# Altium PCB HaptikGeriBeslemeDevresi_PCB.PcbDoc
Units mm, origin at the board's own origin, x right, y up, seen from the top; angles counter-clockwise.
Board outline 72 x 71 mm, 2 copper layers (Top Layer, Bottom Layer); 35 components, 36 nets, 155 pads, 25 vias.
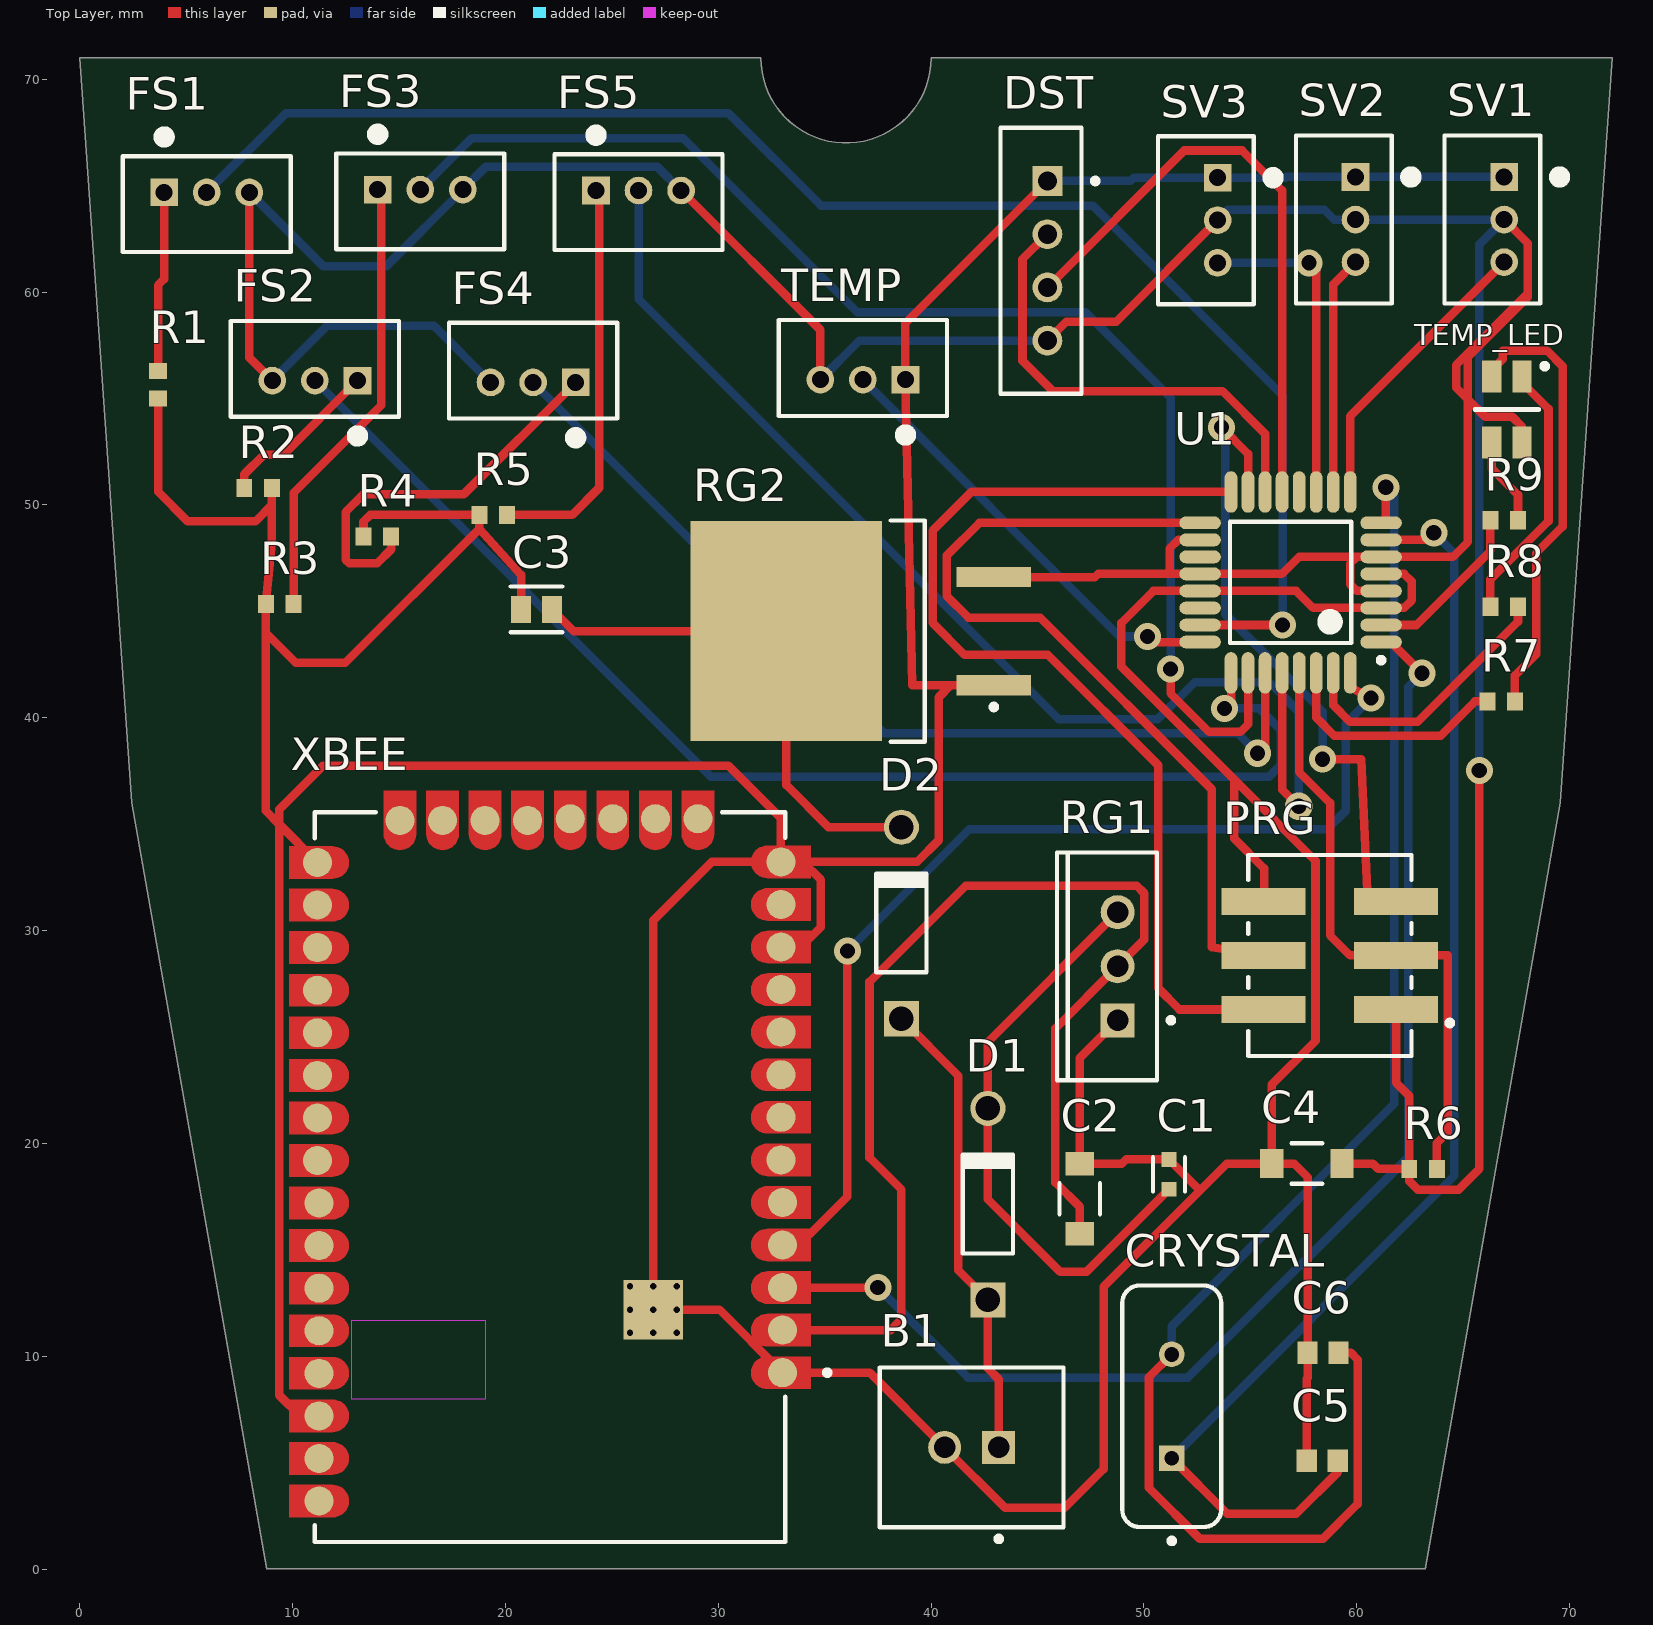
[diagram p0: Top Layer view]
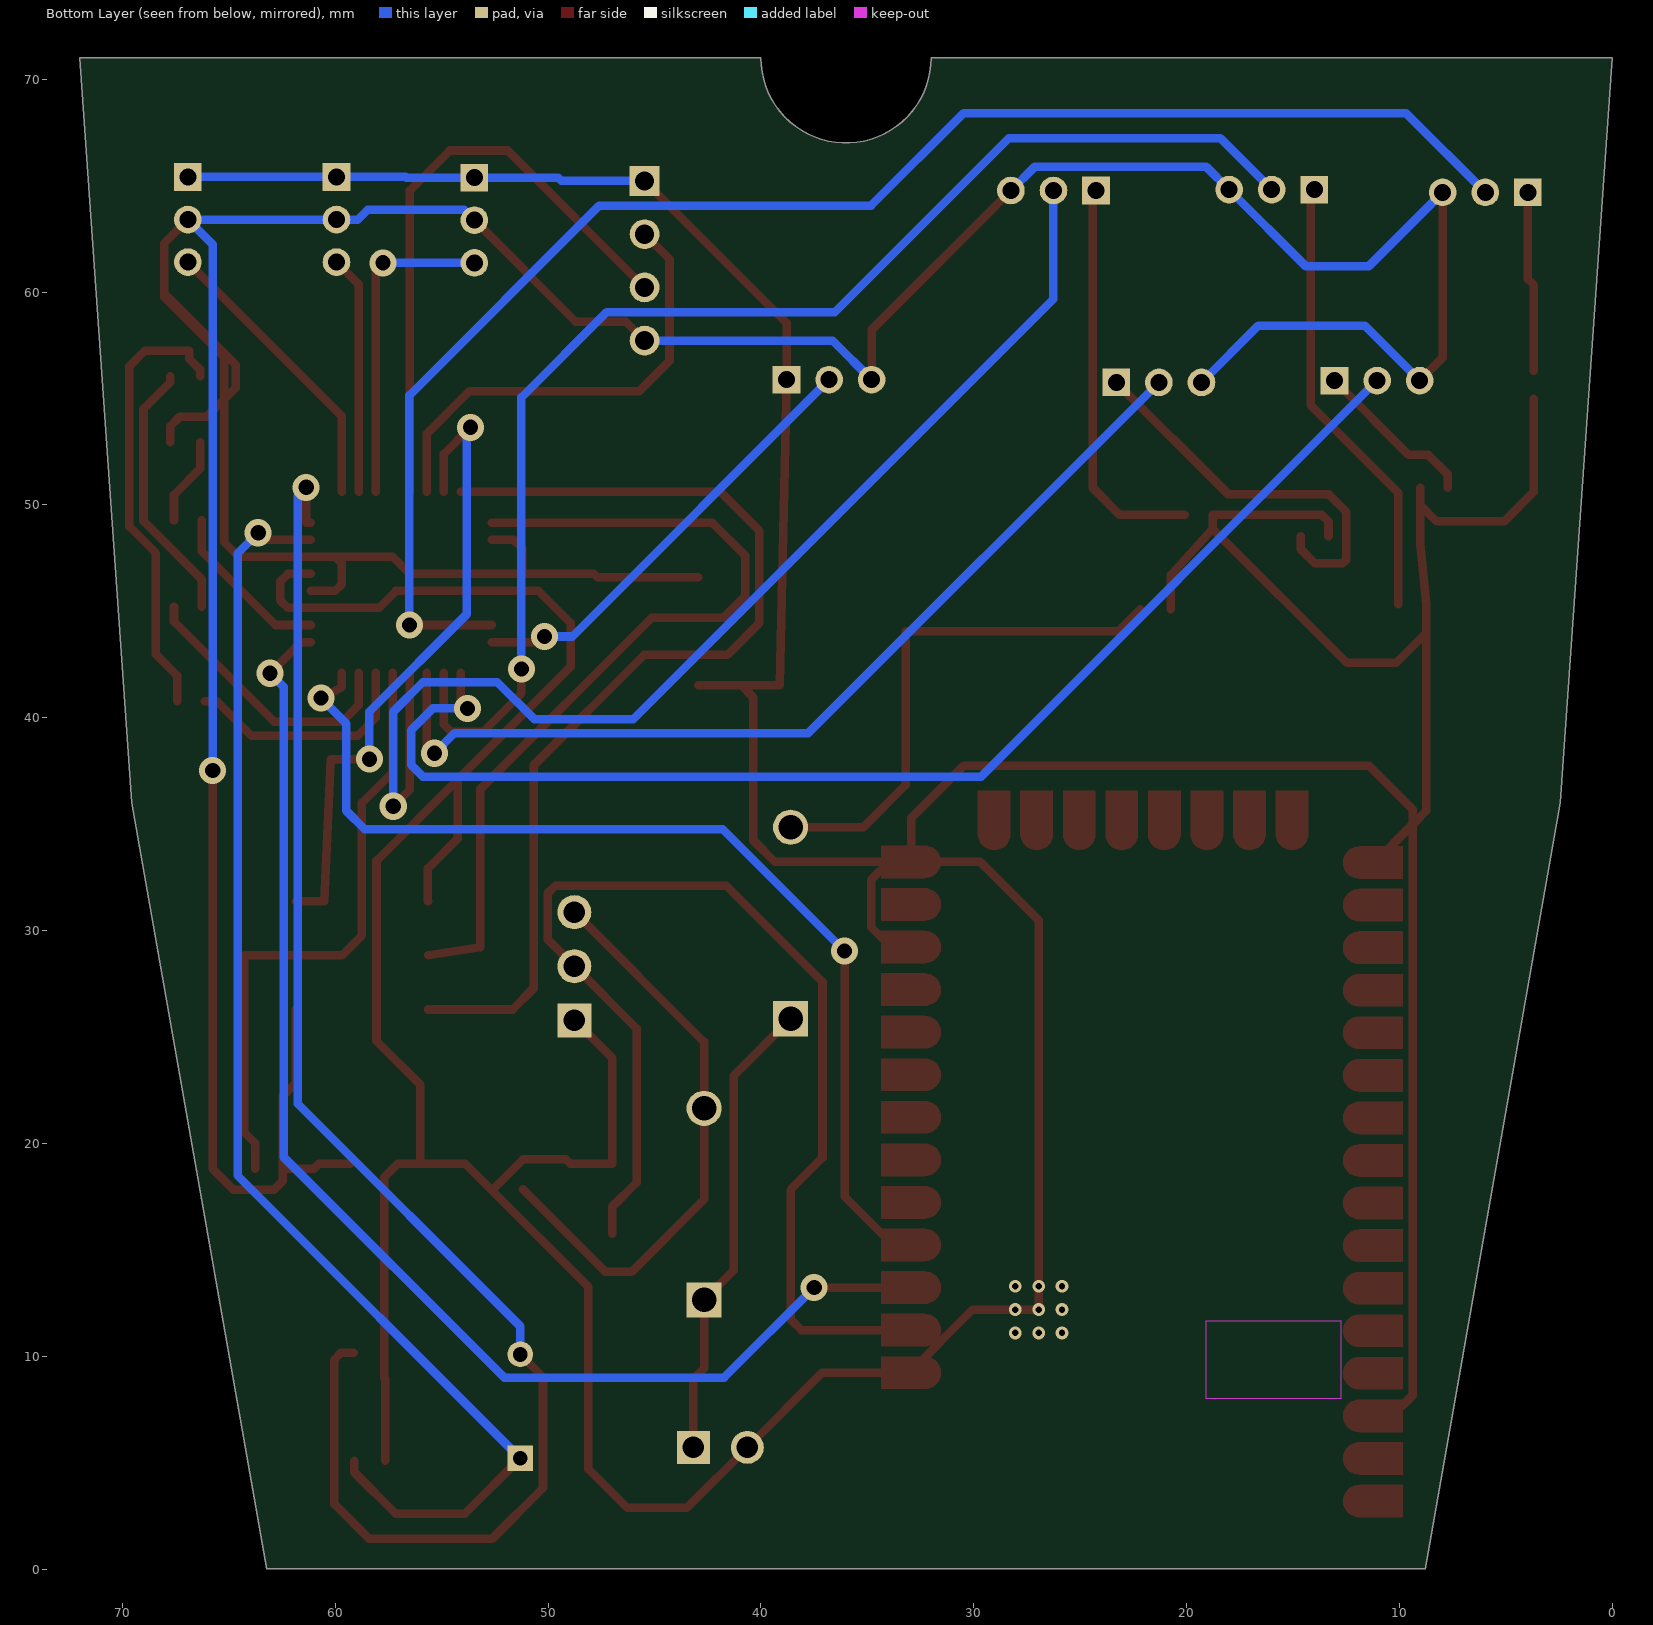
[diagram p1: Bottom Layer view, seen from below]
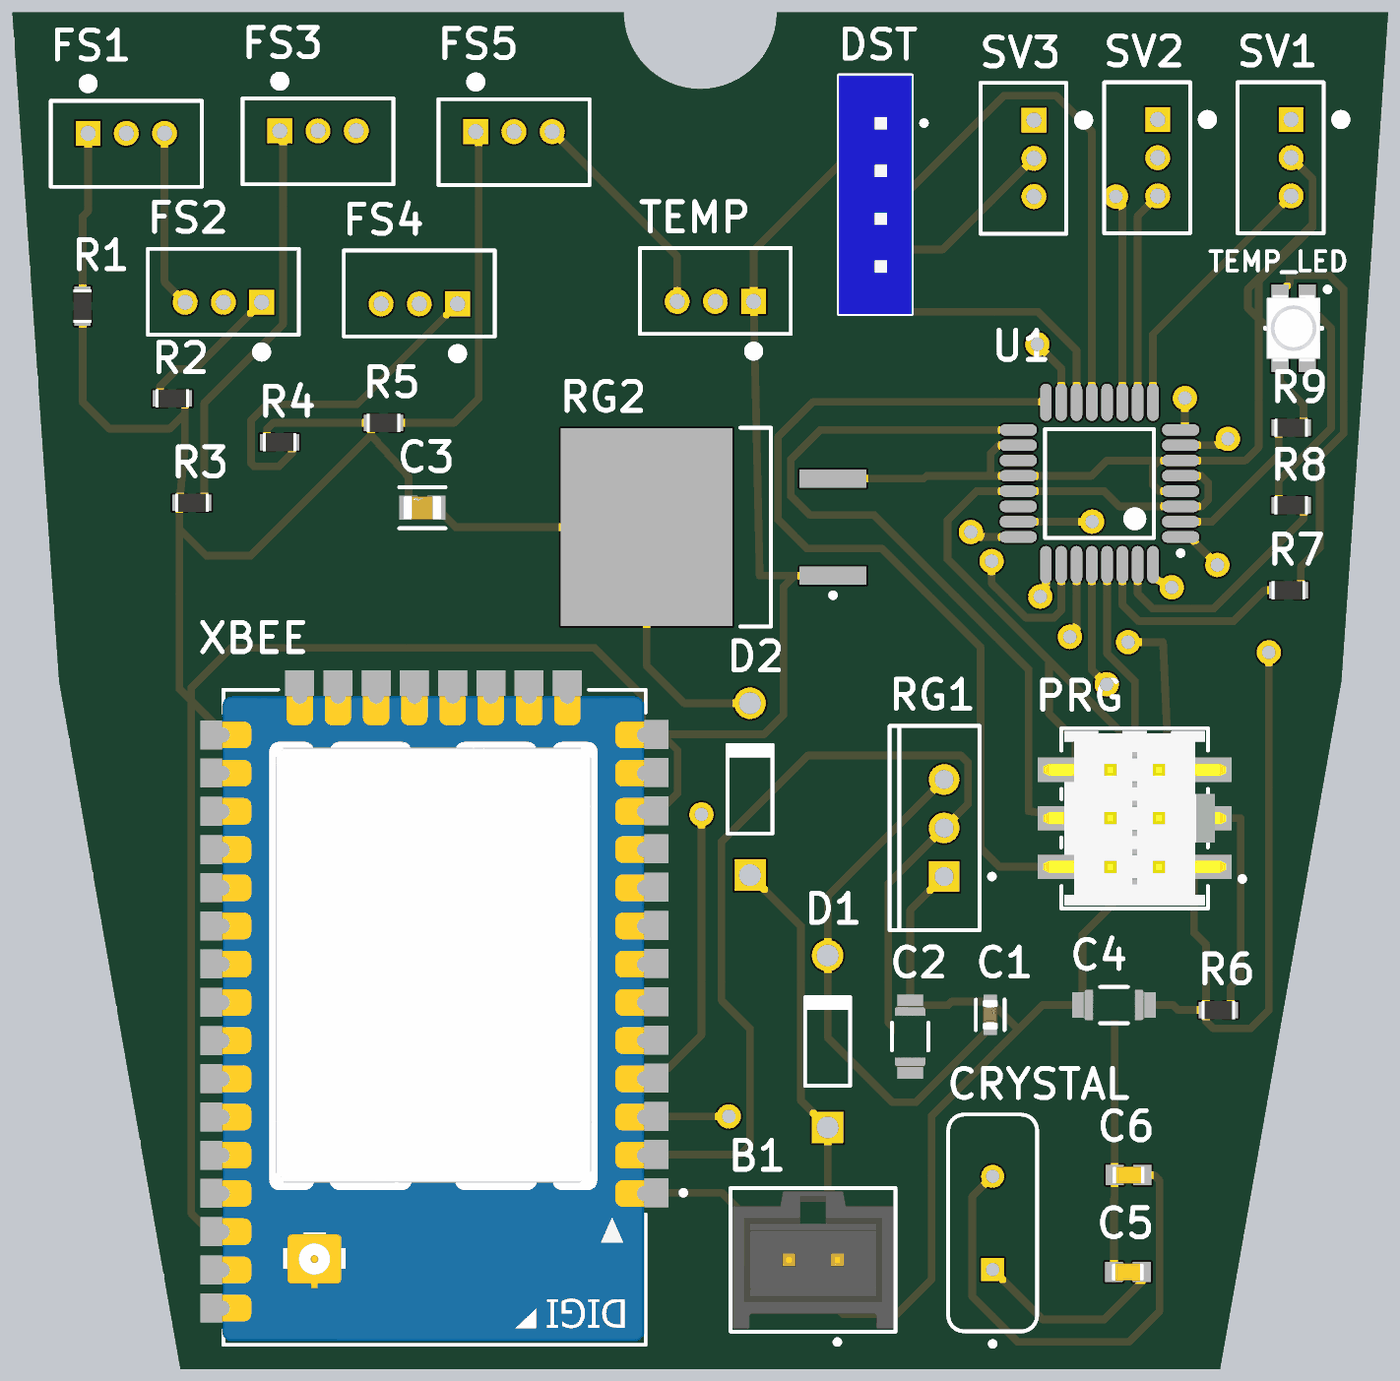
[diagram p2: 3D render of the assembled board from above, using the file's embedded part models]

## Layer stack, top to bottom
Top Solder: solder mask 0.0102, Solder Resist, Dk 3.5
Top Layer: signal copper 0.0356
Dielectric 1: dielectric 0.32, FR-4, Dk 4.8
Bottom Layer: signal copper 0.0356
Bottom Solder: solder mask 0.0102, Solder Resist, Dk 3.5

## Board outline
8.8,0.005 2.452,36.005 0.005,71.005 32.005,71.005 ccw(c36.005,71.005) 40.005,71.005 72.005,71.005 69.558,36.005 63.21,0.005

## Design rules (kind name [scope] priority, off if disabled: settings)
Clearance [All] p1: gap=0.254 ignorepadtopadclearanceinfootprint=FALSE except(0: Arc-Hole Track-Hole SMDPad-Hole THPad-Hole Via-Hole Fill-Hole Poly-Hole Region-Hole Text-Hole)
PolygonConnect [All] p1: connectstyle=Relief reliefconductorwidth=0.254 reliefentries=4 polygonreliefangle="90 Angle" airgapwidth=0.254
RoomDefinition BDDT_Proje_Berk_Ozan_Enes_Görkem_Necdet_Shematic [InComponentClass('BDDT_Proje_Berk_Ozan_Enes_Görkem_Necdet_Shematic')] p1: confinementstyle=ConfineIn formatcopy=TRUE lockcomponents=FALSE outline 151.486,1.956 323.444,1.956 323.444,138.227 151.486,138.227
RoutingVias [All] p1: holewidth=0.711 width=1.27 viastyle="Through Hole" minholewidth=0.711 minwidth=1.27 maxholewidth=0.711 maxwidth=1.27
SolderMaskExpansion [All] p1: expansion=0.102 istentingtop=FALSE
Width [All] p1: maxlimit=0.5 minlimit=0.3 preferedwidth=0.4
30 further rules are at their usual default settings.

## Components (designator, comment, footprint, x,y, rotation, side; value= is the part's Value field where it differs from the comment)
B1 "90136-1202" FP-90136-1202-MFG 41.91,5.715 r0 top
C1 "10uF" FP-C1608-080-MFG 51.181,18.542 r90 top
C2 "100uF" FP-C3216X5R1A107M160AC-MFG 46.99,17.399 r90 top
C3 "10uF" FP-GRM21B-0_1-IPC_C 21.463,45.085 r180 top
C4 "100uF" FP-C3216X5R1A107M160AC-MFG 57.658,19.05 r180 top
C5 "22pF" CAPC1608X90X35ML10T15 58.383,5.08 r0 top
C6 "22pF" CAPC1608X90X35ML10T15 58.42,10.16 r0 top
CRYSTAL "16Mhz" FOX-FOXSLF160-20 51.308,7.647 r90 top
D1 "1N4001-T" DIOD-DO-41-P-2_V 42.672,17.145 r90 top
D2 "1N4001-T" DIOD-DO-41-P-2_V 38.608,30.353 r90 top
DST "B4B-EH-A(LF)(SN)" JST-B4B-EH-A_V 45.466,61.468 r270 top
FS1 "B3B-PH-K-S(LF)(SN)" JST-B3B-PH-K-S-3_V 5.969,64.135 r0 top
FS2 "B3B-PH-K-S(LF)(SN)" JST-B3B-PH-K-S-3_V 11.049,56.388 r180 top
FS3 "B3B-PH-K-S(LF)(SN)" JST-B3B-PH-K-S-3_V 16.002,64.262 r0 top
FS4 "B3B-PH-K-S(LF)(SN)" JST-B3B-PH-K-S-3_V 21.304,56.303 r180 top
FS5 "B3B-PH-K-S(LF)(SN)" JST-B3B-PH-K-S-3_V 26.257,64.22 r0 top
PRG "IPL1-103-02-L-D-K" FP-IPL1-103-02-L-D-K-0 58.739,28.829 r180 top
R1 "10k" RESC1609X55X30LL15T15 3.683,55.641 r90 top
R2 "10k" RESC1609X55X30LL15T15 8.382,50.8 r180 top
R3 "10k" RESC1609X55X30LL15T15 9.398,45.339 r0 top
R4 "10k" RESC1609X55X30LL15T15 13.985,48.514 r0 top
R5 "10k" RESC1609X55X30LL15T15 19.431,49.53 r0 top
R6 "10k" RESC1609X55X30LL15T15 63.119,18.796 r180 top
R7 "220" RESC1608X55X30LL15T15 66.787,40.767 r180 top
R8 "220" RESC1608X55X30LL15T15 66.929,45.212 r0 top
R9 "220" RESC1608X55X30LL15T15 66.929,49.276 r180 top
RG1 "LM1117T-3.3/NOPB" NDE0003A 48.768,28.321 r90 top
RG2 "L7905CD2T-TR" TO-263_L 36.703,44.069 r180 top
SV1 "B3B-PH-K-S(LF)(SN)" JST-B3B-PH-K-S-3_V 66.379,63.405 r270 top
SV2 "B3B-PH-K-S(LF)(SN)" JST-B3B-PH-K-S-3_V 59.394,63.405 r270 top
SV3 "B3B-PH-K-S(LF)(SN)" JST-B3B-PH-K-S-3_V 52.917,63.373 r270 top
TEMP "B3B-PH-K-S(LF)(SN)" JST-B3B-PH-K-S-3_V 36.798,56.43 r180 top
TEMP_LED "150141M173100" 3528_A 67.056,54.483 r270 top
U1 "ATmega328P-AU" 32A_M 56.896,46.355 r180 top
XBEE "XBP9X-DMUS-001" FP-XBP9X-DMUS-001-MFG 22.098,18.415 r180 top

## Footprints (in the part's own frame and the unit in brackets; to place one, negate y for a bottom-side part, rotate by r counter-clockwise, add the part's x,y. Pads: shape width x height; smd on the part's side, far side on the other; paste and mask are expansions set on the pad)
32A_M [mm] "Thin QFP, 32-Leads, Body 7x7mm, Pitch 0.8mm, IPC Low Density"
  oval 1.95x0.6 smd: 1(-4.25,2.8) 2(-4.25,2) 3(-4.25,1.2) 4(-4.25,0.4) 5(-4.25,-0.4) 6(-4.25,-1.2) 7(-4.25,-2) 8(-4.25,-2.8) 17(4.25,-2.8) 18(4.25,-2) 19(4.25,-1.2) 20(4.25,-0.4) 21(4.25,0.4) 22(4.25,1.2) 23(4.25,2) 24(4.25,2.8)
  oval 0.6x1.95 smd: 9(-2.8,-4.25) 10(-2,-4.25) 11(-1.2,-4.25) 12(-0.4,-4.25) 13(0.4,-4.25) 14(1.2,-4.25) 15(2,-4.25) 16(2.8,-4.25) 25(2.8,4.25) 26(2,4.25) 27(1.2,4.25) 28(0.4,4.25) 29(-0.4,4.25) 30(-1.2,4.25) 31(-2,4.25) 32(-2.8,4.25)
  silkscreen extent -4.38,-2.85 2.85,3.77, body extent -3.5,-3.5 3.5,3.5, height 1.2
3528_A [mm] "Chip LED, 4-Leads, Body 2.8x3.5mm (max), Pitch 1.42mm, IPC Medium Density"
  rect 1.5x0.9 smd: 1(1.55,0.707) 2(1.55,-0.71) 3(-1.55,0.707) 4(-1.55,-0.707)
  silkscreen extent -2.15,-1.5 0.02,1.9, body extent -1.75,-1.4 1.75,1.4, height 1.87
CAPC1608X90X35ML10T15 [mm] "Chip Capacitor, 2-Leads, Body 1.7x0.9mm, IPC Low Density"
  rect 0.95x1.05 smd: 1(-0.725,0) 2(0.725,0)
  body extent -0.85,-0.45 0.85,0.45, height 0.9
DIOD-DO-41-P-2_V [mm] "2-Leads, Axial Lead, Body 4.635x2.36mm, Pin Spacing 9mm"
  rect 1.65x1.65 hole 1.15: 1(-4.5,0)
  round 1.65 hole 1.15: 2(4.5,0)
  silkscreen extent -2.32,-1.18 2.32,1.18, body extent -4.93,-1.18 4.93,1.18, height 2.35
FOX-FOXSLF160-20 [mm] "THD, 2-Leads, Body 11.35x4.65mm"
  rect 1.2x1.2 hole 0.7: 1(-2.44,0)
  round 1.2 hole 0.7: 2(2.44,0)
  silkscreen extent -6.45,-2.33 5.68,2.33, body extent -5.67,-2.32 5.68,2.33, height 3.6
FP-90136-1202-MFG [mm]
  rect 1.55x1.55 hole 1 paste-1000 mask+0: 1(1.27,0)
  round 1.55 hole 1 paste-1000 mask+0: 2(-1.27,0)
  silkscreen extent -4.32,-4.42 4.32,3.75, body extent -4.42,-3.86 4.42,3.86, height 0.25
FP-C1608-080-MFG [mm]
  rect 0.7x0.7 smd paste+0 mask+0: 1(-0.7,0) 2(0.7,0)
  silkscreen extent -0.8,-0.75 0.8,0.75, body extent -1.15,-0.55 1.15,0.55, height 0.25
FP-C3216X5R1A107M160AC-MFG [mm]
  rect 1.1x1.35 smd paste+0 mask+0: 1(-1.65,0) 2(1.65,0)
  silkscreen extent -0.73,-0.95 0.73,0.95, body extent -2.3,-1.05 2.3,1.05, height 0.25
FP-GRM21B-0_1-IPC_C [mm]
  rect 0.958x1.262 smd paste+0 mask+0: 1(-0.727,0) 2(0.727,0)
  silkscreen extent -1.21,-1.07 1.21,1.07, body extent -1.31,-0.77 1.31,0.77, height 0.25
FP-IPL1-103-02-L-D-K-0 [mm]
  rect 3.94x1.27 smd paste+0 mask+0: 1(-3.11,2.54) 2(-3.11,0) 3(-3.11,-2.54) 4(3.11,2.54) 5(3.11,0) 6(3.11,-2.54)
  silkscreen extent -5.76,-4.72 3.84,4.72, body extent -5.18,-4.82 5.18,4.82, height 0.25
FP-XBP9X-DMUS-001-MFG [mm]
  round 1.368 smd paste+0 mask+0: 1(-10.926,9.19) 2(-10.926,7.19) 3(-10.926,5.19) 4(-10.926,3.19) 5(-10.926,1.19) 6(-10.85,-0.81) 7(-10.85,-2.81) 8(-10.85,-4.81) 9(-10.85,-6.81) 10(-10.85,-8.81) 11(-10.85,-10.81) 12(-10.85,-12.81) 13(-10.85,-14.81) 14(-6.95,-16.836) 15(-4.95,-16.836) 16(-2.95,-16.836) 17(-0.95,-16.836) 18(1.05,-16.76) 19(3.05,-16.76) 20(5.05,-16.76) 21(7.05,-16.76) 22(10.926,-14.78) 23(10.926,-12.78) 24(10.926,-10.78) 25(10.926,-8.78) 26(10.926,-6.78) 27(10.926,-4.78) 28(10.926,-2.78) 29(10.926,-0.78) 30(10.85,1.22) 31(10.85,3.22) 32(10.85,5.22) 33(10.85,7.22) 34(10.85,9.22) 35(10.85,11.22) 36(10.85,13.22) 37(10.85,15.22)
  rect 2.79x2.79 smd paste+0 mask+0: 38(-4.855,6.225)
  Top Layer region: 12.25,14.46 10.21,14.46 9.919,14.518 9.673,14.683 9.508,14.929 9.45,15.22 9.45,15.22 9.508,15.511 9.673,15.757 9.919,15.922 10.21,15.98 10.21,15.98 12.25,15.98
  Top Layer region: 12.25,12.46 10.21,12.46 9.919,12.518 9.673,12.683 9.508,12.929 9.45,13.22 9.45,13.22 9.508,13.511 9.673,13.757 9.919,13.922 10.21,13.98 10.21,13.98 12.25,13.98
  Top Layer region: 12.25,10.46 10.21,10.46 9.919,10.518 9.673,10.683 9.508,10.929 9.45,11.22 9.45,11.22 9.508,11.511 9.673,11.757 9.919,11.922 10.21,11.98 10.21,11.98 12.25,11.98
  Top Layer region: 12.25,8.46 10.21,8.46 9.919,8.518 9.673,8.683 9.508,8.929 9.45,9.22 9.45,9.22 9.508,9.511 9.673,9.757 9.919,9.922 10.21,9.98 10.21,9.98 12.25,9.98
  Top Layer region: 12.25,6.46 10.21,6.46 9.919,6.518 9.673,6.683 9.508,6.929 9.45,7.22 9.45,7.22 9.508,7.511 9.673,7.757 9.919,7.922 10.21,7.98 10.21,7.98 12.25,7.98
  Top Layer region: 12.25,4.46 10.21,4.46 9.919,4.518 9.673,4.683 9.508,4.929 9.45,5.22 9.45,5.22 9.508,5.511 9.673,5.757 9.919,5.922 10.21,5.98 10.21,5.98 12.25,5.98
  Top Layer region: 12.25,2.46 10.21,2.46 9.919,2.518 9.673,2.683 9.508,2.929 9.45,3.22 9.45,3.22 9.508,3.511 9.673,3.757 9.919,3.922 10.21,3.98 10.21,3.98 12.25,3.98
  Top Layer region: 12.25,0.46 10.21,0.46 9.919,0.518 9.673,0.683 9.508,0.929 9.45,1.22 9.45,1.22 9.508,1.511 9.673,1.757 9.919,1.922 10.21,1.98 10.21,1.98 12.25,1.98
  Top Layer region: 12.25,-1.54 10.21,-1.54 9.919,-1.482 9.673,-1.317 9.508,-1.071 9.45,-0.78 9.45,-0.78 9.508,-0.489 9.673,-0.243 9.919,-0.078 10.21,-0.02 10.21,-0.02 12.25,-0.02
  Top Layer region: 12.25,-3.54 10.21,-3.54 9.919,-3.482 9.673,-3.317 9.508,-3.071 9.45,-2.78 9.45,-2.78 9.508,-2.489 9.673,-2.243 9.919,-2.078 10.21,-2.02 10.21,-2.02 12.25,-2.02
  Top Layer region: 12.25,-5.54 10.21,-5.54 9.919,-5.482 9.673,-5.317 9.508,-5.071 9.45,-4.78 9.45,-4.78 9.508,-4.489 9.673,-4.243 9.919,-4.078 10.21,-4.02 10.21,-4.02 12.25,-4.02
  Top Layer region: 12.25,-7.54 10.21,-7.54 9.919,-7.482 9.673,-7.317 9.508,-7.071 9.45,-6.78 9.45,-6.78 9.508,-6.489 9.673,-6.243 9.919,-6.078 10.21,-6.02 10.21,-6.02 12.25,-6.02
  Top Layer region: 12.25,-9.54 10.21,-9.54 9.919,-9.482 9.673,-9.317 9.508,-9.071 9.45,-8.78 9.45,-8.78 9.508,-8.489 9.673,-8.243 9.919,-8.078 10.21,-8.02 10.21,-8.02 12.25,-8.02
  Top Layer region: 12.25,-11.54 10.21,-11.54 9.919,-11.482 9.673,-11.317 9.508,-11.071 9.45,-10.78 9.45,-10.78 9.508,-10.489 9.673,-10.243 9.919,-10.078 10.21,-10.02 10.21,-10.02 12.25,-10.02
  Top Layer region: 12.25,-13.54 10.21,-13.54 9.919,-13.482 9.673,-13.317 9.508,-13.071 9.45,-12.78 9.45,-12.78 9.508,-12.489 9.673,-12.243 9.919,-12.078 10.21,-12.02 10.21,-12.02 12.25,-12.02
  Top Layer region: 12.25,-15.54 10.21,-15.54 9.919,-15.482 9.673,-15.317 9.508,-15.071 9.45,-14.78 9.45,-14.78 9.508,-14.489 9.673,-14.243 9.919,-14.078 10.21,-14.02 10.21,-14.02 12.25,-14.02
  Top Layer region: 6.29,-18.16 6.29,-16.12 6.348,-15.829 6.513,-15.583 6.759,-15.418 7.05,-15.36 7.05,-15.36 7.341,-15.418 7.587,-15.583 7.752,-15.829 7.81,-16.12 7.81,-16.12 7.81,-18.16
  Top Layer region: 4.29,-18.16 4.29,-16.12 4.348,-15.829 4.513,-15.583 4.759,-15.418 5.05,-15.36 5.05,-15.36 5.341,-15.418 5.587,-15.583 5.752,-15.829 5.81,-16.12 5.81,-16.12 5.81,-18.16
  Top Layer region: 2.29,-18.16 2.29,-16.12 2.348,-15.829 2.513,-15.583 2.759,-15.418 3.05,-15.36 3.05,-15.36 3.341,-15.418 3.587,-15.583 3.752,-15.829 3.81,-16.12 3.81,-16.12 3.81,-18.16
  Top Layer region: 0.29,-18.16 0.29,-16.12 0.348,-15.829 0.513,-15.583 0.759,-15.418 1.05,-15.36 1.05,-15.36 1.341,-15.418 1.587,-15.583 1.752,-15.829 1.81,-16.12 1.81,-16.12 1.81,-18.16
  Top Layer region: -1.71,-18.16 -1.71,-16.12 -1.652,-15.829 -1.487,-15.583 -1.241,-15.418 -0.95,-15.36 -0.95,-15.36 -0.659,-15.418 -0.413,-15.583 -0.248,-15.829 -0.19,-16.12 -0.19,-16.12 -0.19,-18.16
  Top Layer region: -3.71,-18.16 -3.71,-16.12 -3.652,-15.829 -3.487,-15.583 -3.241,-15.418 -2.95,-15.36 -2.95,-15.36 -2.659,-15.418 -2.413,-15.583 -2.248,-15.829 -2.19,-16.12 -2.19,-16.12 -2.19,-18.16
  Top Layer region: -5.71,-18.16 -5.71,-16.12 -5.652,-15.829 -5.487,-15.583 -5.241,-15.418 -4.95,-15.36 -4.95,-15.36 -4.659,-15.418 -4.413,-15.583 -4.248,-15.829 -4.19,-16.12 -4.19,-16.12 -4.19,-18.16
  Top Layer region: -7.71,-18.16 -7.71,-16.12 -7.652,-15.829 -7.487,-15.583 -7.241,-15.418 -6.95,-15.36 -6.95,-15.36 -6.659,-15.418 -6.413,-15.583 -6.248,-15.829 -6.19,-16.12 -6.19,-16.12 -6.19,-18.16
  Top Layer region: -12.25,-14.05 -10.21,-14.05 -9.919,-14.108 -9.673,-14.273 -9.508,-14.519 -9.45,-14.81 -9.45,-14.81 -9.508,-15.101 -9.673,-15.347 -9.919,-15.512 -10.21,-15.57 -10.21,-15.57 -12.25,-15.57
  Top Layer region: -12.25,-12.05 -10.21,-12.05 -9.919,-12.108 -9.673,-12.273 -9.508,-12.519 -9.45,-12.81 -9.45,-12.81 -9.508,-13.101 -9.673,-13.347 -9.919,-13.512 -10.21,-13.57 -10.21,-13.57 -12.25,-13.57
  Top Layer region: -12.25,-10.05 -10.21,-10.05 -9.919,-10.108 -9.673,-10.273 -9.508,-10.519 -9.45,-10.81 -9.45,-10.81 -9.552,-11.19 -9.83,-11.468 -10.21,-11.57 -10.21,-11.57 -12.25,-11.57
  Top Layer region: -12.25,-8.05 -10.21,-8.05 -9.919,-8.108 -9.673,-8.273 -9.508,-8.519 -9.45,-8.81 -9.45,-8.81 -9.552,-9.19 -9.83,-9.468 -10.21,-9.57 -10.21,-9.57 -12.25,-9.57
  Top Layer region: -12.25,-6.05 -10.21,-6.05 -9.919,-6.108 -9.673,-6.273 -9.508,-6.519 -9.45,-6.81 -9.45,-6.81 -9.552,-7.19 -9.83,-7.468 -10.21,-7.57 -10.21,-7.57 -12.25,-7.57
  Top Layer region: -12.25,-4.05 -10.21,-4.05 -9.919,-4.108 -9.673,-4.273 -9.508,-4.519 -9.45,-4.81 -9.45,-4.81 -9.552,-5.19 -9.83,-5.468 -10.21,-5.57 -10.21,-5.57 -12.25,-5.57
  Top Layer region: -12.25,-2.05 -10.21,-2.05 -9.919,-2.108 -9.673,-2.273 -9.508,-2.519 -9.45,-2.81 -9.45,-2.81 -9.552,-3.19 -9.83,-3.468 -10.21,-3.57 -10.21,-3.57 -12.25,-3.57
  Top Layer region: -12.25,-0.05 -10.21,-0.05 -9.919,-0.108 -9.673,-0.273 -9.508,-0.519 -9.45,-0.81 -9.45,-0.81 -9.552,-1.19 -9.83,-1.468 -10.21,-1.57 -10.21,-1.57 -12.25,-1.57
  Top Layer region: -12.25,1.95 -10.21,1.95 -9.919,1.892 -9.673,1.727 -9.508,1.481 -9.45,1.19 -9.45,1.19 -9.552,0.81 -9.83,0.532 -10.21,0.43 -10.21,0.43 -12.25,0.43
  Top Layer region: -12.25,3.95 -10.21,3.95 -9.919,3.892 -9.673,3.727 -9.508,3.481 -9.45,3.19 -9.45,3.19 -9.552,2.81 -9.83,2.532 -10.21,2.43 -10.21,2.43 -12.25,2.43
  Top Layer region: -12.25,5.95 -10.21,5.95 -9.919,5.892 -9.673,5.727 -9.508,5.481 -9.45,5.19 -9.45,5.19 -9.552,4.81 -9.83,4.532 -10.21,4.43 -10.21,4.43 -12.25,4.43
  Top Layer region: -12.25,7.95 -10.21,7.95 -9.919,7.892 -9.673,7.727 -9.508,7.481 -9.45,7.19 -9.45,7.19 -9.552,6.81 -9.83,6.532 -10.21,6.43 -10.21,6.43 -12.25,6.43
  Top Layer region: -12.25,9.95 -10.21,9.95 -9.919,9.892 -9.673,9.727 -9.508,9.481 -9.45,9.19 -9.45,9.19 -9.552,8.81 -9.83,8.532 -10.21,8.43 -10.21,8.43 -12.25,8.43
  Keep-Out Layer region: 3.03,6.74 9.35,6.74 9.35,10.42 3.03,10.42
  silkscreen extent -13.15,-17.14 11.05,17.14, body extent -12.35,-18.26 12.35,17.24, height 0.25
JST-B3B-PH-K-S-3_V [mm] "Connector, 3-Leads, Body 7.9x4.5mm, Pitch 2mm"
  rect 1.3x1.3 hole 0.8: 1(-2,0.55)
  round 1.3 hole 0.8: 2(0,0.55) 3(2,0.55)
  silkscreen extent -3.95,-2.25 3.95,3.4, body extent -3.95,-2.25 3.95,2.25, height 6
JST-B4B-EH-A_V [mm] "Header, 4-Leads, Body 12.5x3.8mm, Pitch 2.5mm"
  rect 1.4x1.4 hole 0.9: 1(-3.75,0)
  round 1.4 hole 0.9: 2(-1.25,0) 3(1.25,0) 4(3.75,0)
  silkscreen extent -6.25,-2.2 6.25,2.38, body extent -6.25,-2.2 6.25,1.6, height 6
NDE0003A [mm] "FM, 3-Leads, Body 10.7x4.7mm, Pitch 2.54mm"
  rect 1.6x1.6 hole 1: 1(-2.54,0)
  round 1.6 hole 1: 2(0,0) 3(2.54,0)
  silkscreen extent -5.35,-2.63 5.35,2.85, body extent -5.4,-1.9 5.4,2.9, height 19.4
RESC1608X55X30LL15T15 [mm] "Chip Resistor, 2-Leads, Body 1.75x0.95mm, IPC High Density"
  rect 0.75x0.85 smd: 1(-0.65,0) 2(0.65,0)
  body extent -0.87,-0.48 0.87,0.48, height 0.55
RESC1609X55X30LL15T15 [mm] "Chip Resistor, 2-Leads, Body 1.75x0.95mm, IPC High Density"
  rect 0.75x0.85 smd: 1(-0.65,0) 2(0.65,0)
  body extent -0.87,-0.48 0.87,0.48, height 0.55
TO-263_L [mm] "D2-PAK, 4-Leads, Body 9.2x10.2mm, Pitch 2.54mm, Lead Span 15.4mm, IPC High Density"
  rect 3.5x0.95 smd: 1(-6.25,2.54) 3(-6.25,-2.54)
  rect 9x10.35 smd: 4(3.5,0)
  silkscreen extent -6.38,-5.2 -1.4,5.2, body extent -3,-5.2 6.35,5.2, height 4.6

## Part data
B1: library part CMP-04776-000259-1, "CONN HEADER VERT 2POS 2.54MM", Color=Black, Contact Resistance=20mR, Current Rating=3A, Flammability Rating="UL94 V-0", Max Operating Temperature=125°C, Max Voltage Rating (DC)=350.35kV, Min Operating Temperature=-55°C, Package Quantity=3040, Voltage Rating=350V, Insulation Resistance=5GR, Contact Material=Brass, Contact Plating=Gold, Gender=Male, Glow Wire Compliant=Non-compliant, Housing Color=Black, Housing Material=Polyester, Lead Free="Lead Free", Lead Pitch=2.54mm, Mount="Through Hole", Number of Circuits=2, Number of Contacts=2, Number of Poles=2, Number of Positions=2, Number of Rows=1, Orientation=Vertical, Packaging=Tray, Pitch=2.54mm, Radiation Hardening=No, RoHS Compliant=Yes, Series="C-Grid III", Termination="Through Hole", Voltage Rating (AC)=350V, Voltage Rating (DC)=350V, Working Voltage=350V
C1: library part CMP-2000-04979-2, "CAP CER 10UF 10V X5R 0603", Manufacturer=TDK, Manufacturer Part Number=C1608X5R1A106K080AC, Package=C1608-080, Temperature="-55°C to +85°C", Temperature Characteristic=X5R, Temperature Coefficient=15%, Temperature Range High=+85°C, Temperature Range Low=-55°C, Tolerance=10%, Voltage=10V, Automotive=No, Capacitance=10uF, Category=Cap, ComponentLink2Description=Datasheet, ComponentLink2URL=https://product.tdk.com/info/en/documents/chara_sheet/C1608X5R1A106K080AC.pdf, Device Class L1="Passive Components", Device Class L2=Capacitors, Device Class L3="Ceramic Capacitors", Digikey Description="CAP CER 10UF 10V X5R 0603", Footprint Url=https://product.tdk.com/info/en/catalog/spec/mlccspec_commercial_general_midvoltage_en.pdf, Height=0.9mm, Lead Free=Yes, Material=Ceramic, Mouser Description="CAP CER 10UF 10V X5R 0603", Octopart=https://octopart.com/c1608x5r1a106k080ac-tdk-26013468, RoHS=TRUE, Voltage Rating=10V, Ipc Land Pattern Name=CAPC16080X80
C2 C4: library part CMP-2000-05396-2, "CAP CER 100UF 10V X5R 1206", Manufacturer="TDK Corporation", Manufacturer Part Number=C3216X5R1A107M160AC, Temperature="-55°C to +85°C", Temperature Characteristic=X5R, Temperature Coefficient=15%, Temperature Range High=+85°C, Temperature Range Low=-55°C, Tolerance=20%, Voltage Rating=10V, Automotive=No, Capacitance=100uF, Category=Cap, ComponentLink2Description=Datasheet, ComponentLink2URL=https://product.tdk.com/info/en/catalog/spec/mlccspec_commercial_general_midvoltage_en.pdf, Device Class L1="Passive Components", Device Class L2=Capacitors, Device Class L3="Ceramic Capacitors", Digikey Description="CAP CER 100UF 10V X5R 1206", Height=1.9mm, Lead Free=Yes, Material=Ceramic, Mouser Description="CAP CER 100UF 10V X5R 1206", Octopart=https://octopart.com/c3216x5r1a107m160ac-tdk-25947775, Package=C3216X5R1A107M160AC, RoHS=TRUE, Ipc Land Pattern Name=CAPC320160X160
C3: library part CMP-2007-03453-2, "Chip Multilayer Ceramic Capacitors for General Purpose, 0805, 10uF, X5R, 15%, 10%, 16V", Case Code (Metric)=2012, Case Code (Imperial)=0805, Dielectric=X5R, Max Operating Temperature=85°C, Min Operating Temperature=-55°C, Package Quantity=1, Tolerance=10%, Voltage=16V, Capacitance=10uF, Case/Package=0805, Depth=1.25mm, Height=1.25mm, Lead Free="Lead Free", Length=2mm, Material=Ceramic, Mount="Surface Mount", Packaging="Tape and Reel", Radiation Hardening=No, REACH SVHC="No SVHC", Termination=SMD/SMT, Thickness=0.053inch, Voltage Rating=16V, Voltage Rating (DC)=16V, Width=1.25mm
C5 C6: library part CMP-2000-04945-1, "Chip Capacitor, 22 pF, +/- 5%, 50 V, -55 to 125 degC, 0603 (1608 Metric), RoHS, Tape and Reel", Case Size/Dimension=0603, Dielectric=C0G, Manufacturer=Murata, Package Description="2-Pin Surface Mount Device, Body 1.6 x 0.8 mm", Package Reference=603, Rated Voltage=50V, Tolerance (%)=±5%, Capacitance=22pF, Datasheet URL=https://datasheet.ciiva.com/11786/0900766b807a1cab-11786398.pdf, Datasheet Version=Jul-06, Manufacturer URL=http://www.murata.com/
CRYSTAL: library part CMP-1749-00003-1, "Resistance Weld Thru-Hole Crystal, 16 MHz, -20 to 70 degC, 2-Pin THD, RoHS, Bulk", Case\Package=Axial, Max Operating Temperature="155 degC", Min Operating Temperature="-55 degC", Package Quantity=200, Power Rating="250 mW", Resistance="221 kohm", Tolerance=1%, Voltage Rating="250 V", ComponentLink1Description="Manufacturer URL", ComponentLink1URL=http://www.foxonline.com/, ComponentLink2Description=Datasheet, ComponentLink2URL=http://www.foxonline.com/pdfs/hc49slf.pdf, DatasheetVersion=Mar-15, Length="0.248 inch", Mount="Through Hole", PackageDescription="2-Pin Through Hole Device, Body 11.35 x 4.65 mm", PackageReference=FOXSLF160-20, Packaging=Bulk, RoHSCompliant=true
D1 D2: library part CMP-0639-00006-2, "1.0 A Rectifier, 15 pF, 50 V, -65 to 150 degC, 2-Pin DO-41 Plastic, RoHS, Tape and Reel", Manufacturer="Diodes Inc", Max. Average Rectified Current IO (A)=1, Operating Temperature Range (degC)="-65 to 150", ComponentLink1Description="Manufacturer URL", ComponentLink1URL=http://diodes.com/, ComponentLink2Description=Datasheet, ComponentLink2URL=http://diodes.com/datasheets/ds28002.pdf, CT (pF)=15, DatasheetVersion="Rev. 8-2", Max. IFSM (A)=30, Max. IR (uA)=5, Mounting Technology="Through Hole", PackageDescription="2-Pin Axial Lead, Body 4.635 x 2.36 mm, Lead Spread 25.4 mm", PackageReference=DO-41-P-2, Packing="Tape and Reel", PartNumber=1N4001-T, RoHS=TRUE, VF (V)=1, VRRM (V)=50
DST: library part CMP-2000-05904-1, "Male Header, Pitch 2.5 mm, 1 x 4 Position, Height 6 mm, Tail Length 3.2 mm, -25 to 85 degC, RoHS, Bulk", Manufacturer=JST, Package Description="Male Header, Pitch 2.5 mm, 1 x 4 Position, Height 6 mm, Tail Length 3.2 mm", Package Reference=B4B-EH-A, Datasheet URL=http://www.jst-mfg.com/product/pdf/eng/eEH.pdf, Datasheet Version=12/2012, Manufacturer URL=http://www.jst.com/home2.html, Mounting Technology=SurfaceMount, No of Positions=4, Pitch=2.5mm, Style/Orientation=StraightHeader/Plug, Termination=Crimp, Type=ShroudedHeader
FS1 FS2 FS3 FS4 FS5 SV1 SV2 SV3 TEMP: library part CMP-2000-05164-1, "Male Header, Pitch 2 mm, 1 x 3 Position, Height 6 mm, Tail Length 3.4 mm, -25 to 85 degC, RoHS, Bulk", Manufacturer=JST, Datasheet URL=https://datasheet.ciiva.com/11746/0900766b80826550-11746939.pdf, Datasheet Version=Oct-06, Manufacturer URL=http://www.jst.com/home2.html, No of Positions=3, Pitch=2mm, Style/Orientation=StraightHeader/Plug, Termination=Crimp, Type=ShroudedHeader
PRG: library part CMP-02766-000692-1, "3 Position 2 Row .100\" (2.54 mm) pitch connector", Max Current Rating=7.4A, Max Operating Temperature=125°C, Max Voltage Rating (AC)=675V, Min Operating Temperature=-55°C, Contact Material=Bronze, Contact Plating=Gold, Depth=9.58mm, Gender=Male, Housing Material=Polymer, Length=9.14mm, Mount="Surface Mount", Number of Contacts=6, Number of Ports=1, Number of Terminals/Pins=6, Orientation=Straight, Packaging=Bulk, Pitch=2.54mm, Radiation Hardening=No, Termination=Solder
R1 R2 R3 R4 R5 R6: library part CMP-1012-00623-3, "Chip Resistor, 10 KOhm, +/- 1%, 0.1 W, -55 to 155 degC, 0603 (1608 Metric), RoHS, Tape and Reel", Case Code (Metric)=1608, Case Code (Imperial)=0603, Manufacturer=Panasonic, Max Operating Temperature=155degC, Max Power Dissipation=100mW, Min Operating Temperature=-55degC, Package Description="2-Pin Surface Mount Device, Body 1.6 x 0.85 mm", Package Quantity=1, Package Reference=603, Resistance=10KOhm, Temperature Coefficient=100ppm\/degreesC, Tolerance=1%, Voltage Rating=75V, Case\/Package=0603, Composition=ThickFilm, Contact Plating=Tin, Datasheet URL=https://industrial.panasonic.com/cdbs/www-data/pdf/RDA0000/AOA0000C304.pdf, Datasheet Version=02/2017, Depth=0.8mm, Height=0.45mm, Lead Free=LeadFree, Length=1.6mm, Manufacturer URL=http://www.panasonic.com/, Military Standard=Not, Mount=SurfaceMount, Mounting Technology=SurfaceMount, Number of Pins=2, Number of Terminations=2, Packaging=TapeandReel, Power Rating=100mW, Radiation Hardening=No, REACH SVHC=NoSVHC, RoHSCompliant=true, Termination=SMD/SMT, Voltage Rating (DC)=75V, Width=0.031inch
R7 R8 R9: library part CMP-2000-00335-2, "Chip Resistor, 220 Ohm, +/- 1%, 0.1 W, -55 to 155 degC, 0603 (1608 Metric), RoHS, Tape and Reel", Case Code (Metric)=1608, Case Code (Imperial)=0603, Max Operating Temperature="155 degC", Min Operating Temperature="-55 degC", Package Quantity=5000, Power Rating="100 mW", Resistance="22 Ohm", Tolerance=1%, Voltage Rating="50 V", Case\Package=0603, ComponentLink1Description="Manufacturer URL", ComponentLink1URL=http://www.panasonic.com/, ComponentLink2Description=Datasheet, ComponentLink2URL=http://industrial.panasonic.com/cdbs/www-data/pdf/RDA0000/AOA0000C86.pdf, DatasheetVersion=Apr-15, Height="0.45 mm", Length="1.6 mm", Mount="Surface Mount", PackageDescription="2-Pin Surface Mount Device, Body 1.6 x 0.85 mm", PackageReference=0603, Packaging="Tape and Reel", Pins=2, REACH SVHC="No SVHC", RoHSCompliant=true, Voltage Rating (DC)="50 V", Width="0.8 mm"
RG1: library part CMP-0062-02494-3, "800mA Low-Dropout Linear Regulator, 3-pin TO-220, Pb-Free", Manufacturer="Texas Instruments", PackageTopMarking=NSUZXYTTE#*LM1117T*3.3, PowerWise=N, ComponentLink1Description="Datasheet URL", ComponentLink1URL=http://www.ti.com/general/docs/lit/getliterature.tsp?genericPartNumber=LM1117-N&fileType=pdf, CompType="LDO IC", PackageDescription="TO-220, Molded, 3 Lead, Straight", PackageReference=NDE0003A, PinCount=3, RoHS=Y
RG2: library part CMP-0244-00191-1, "Negative Voltage Regulator, -5V, 3-Pin D2PAK, Tape and Reel", ComponentLink1Description="Manufacturer URL", ComponentLink1URL=http://www.st.com, ComponentLink2Description=Datasheet, ComponentLink2URL=http://www.st.com/internet/com/TECHNICAL_RESOURCES/TECHNICAL_LITERATURE/DATASHEET/CD00000450.pdf, DatasheetVersion=1/11/2011, PackageDescription="3-Pin Transistor Outline Package 2.54 mm Pitch, 15.4 mm Lead Span (D2PAK)", PackageReference=TO-263, PackageVersion=2011
TEMP_LED: library part CMP-1431-00001-1, "SMD Full-Color Top LED, WL-SFTW, Red & Green & Blue", Color="Red & Green & Blue", Manufacturer="Wuerth Elektronik", ComponentLink1Description="Manufacturer URL", ComponentLink1URL=http://www.we-online.com, ComponentLink2Description=Datasheet, ComponentLink2URL=http://katalog.we-online.com/led/datasheet/150141M173100.pdf, PackageReference=3528_A, PartNumber=150141M173100
U1: library part CMP-0095-00269-2, "8-bit AVR Microcontroller, 32KB Flash, 1KB EEPROM, 2KB SRAM, 32-pin TQFP, Industrial Grade (-40°C to 85°C)", Code_JEDEC=MS-026-ABA, ComponentLink1Description="Manufacturer URL", ComponentLink1URL=http://www.atmel.com/, ComponentLink2Description="ATmega48A/48PA/88A/88PA/168A/168PA/328/328P Datasheet", ComponentLink2URL=http://www.atmel.com/dyn/resources/prod_documents/doc8271.pdf, ComponentLink3Description="ATmega48A/48PA/88A/88PA/168A/168PA/328/328P Summary", ComponentLink3URL=http://www.atmel.com/dyn/resources/prod_documents/8271S.pdf, DatasheetVersion="revD, May-2011", PackageDescription="32-Lead, 7x7x1.0 mm Body, 0.8mm Lead Pitch, Thin Profile Plastic Quad Flat Package (TQFP)", PackageReference=32A, PackageVersion="revC, Oct-2010", RevisionNote="DatasheetVersion & PackageVersion updated. URLs added."
XBEE: library part CMP-84319-000001-1, "XBEE PRO MOD TXRX ISM 915MHZ UFL", Manufacturer="Digi International", Max Frequency=928MHz, Max Supply Voltage=3.6V, Min Supply Voltage=2.4V, Package=0, Receiving Current=40mA, Temperature="-40°C to +85°C", Temperature Range High=+85°C, Temperature Range Low=-40°C, Transmitting Current=330-900mA, Automotive=No, Bandwidth=26MHz, Category=UNK, ComponentLink2Description=Datasheet, ComponentLink2URL=https://www.digi.com/resources/documentation/digidocs/pdfs/90001477.pdf, Data Rate=250kbits/s, Device Class L1="Integrated Circuits (ICs)", Device Class L2="RF Semiconductors and Devices", Device Class L3=Transceivers, Digikey Description="XBEE PRO MOD TXRX ISM 915MHZ UFL", Height=3.556mm, Lead Free=Yes, Manufacturer Part Number=XBP9X-DMUS-001, Number Of Adc Channels=4, Number Of Gpio=20, Octopart=https://octopart.com/xbp9x-dmus-001-digi+international-71530758, RoHS=TRUE, Sensitivity=-103dBm, Interface=SPI,UART

## Via types
v1: diameter 1.27, hole 0.711, Top Layer to Bottom Layer, 16 vias
v2: diameter 0.6, hole 0.3, Top Layer to Bottom Layer, 9 vias

## Nets (pads, with @x,y where several pads share a name; then routed paths per layer and width w, separated by ;. In a path a pad name is that pad's centre, name@x,y a point inside that pad or via, vN(x,y) a via of type N, cw(c..) or ccw(c..) an arc to the next point about the centre after c; other vN are vias at no path point)
+3.3V: C2.1 RG1.2 XBEE.2 | length 55.4
  Top Layer w0.4: XBEE.2 38.1,11.225 38.608,11.733 38.608,17.831 37.109,19.329 37.109,27.584 41.64,32.115 49.657,32.115 50.022,31.75 50.022,29.575 RG1.2 45.847,25.4 45.847,18.161 46.99,17.018 C2.1
+5V: C4.1 DST.4 FS1.3 FS2.3 FS3.3 FS4.3 FS5.3 PRG.1 R6.2 RG2.3 SV1.2 SV2.2 SV3.2 TEMP.3 TEMP_LED.1 U1.4 U1.6 U1.18 U1.20 | length 209.6
  Top Layer w0.4: FS1.3 7.969,56.918 FS2.3 ; FS5.3 34.798,58.229 TEMP.3 ; RG2.3 47.701,46.609 47.847,46.755 51.206,46.755 ; DST.4 46.346,58.598 48.692,58.598 SV3.2 ; U1.18 51.619,48.355 51.206,47.942 51.206,46.755 ; C4.1 60.757,19.05 61.011,18.796 R6.2 ; U1.4 60.008,45.955 59.69,46.273 59.69,47.237 60.008,47.555 ; PRG.1 61.849,22.845 62.469,22.225 R6.2 ; v1(65.761,37.516) 65.761,18.796 64.795,17.831 62.865,17.831 62.469,18.227 R6.2 ; SV1.2 68.047,62.287 68.047,59.944 ; TEMP_LED.1 67.763,53.684 67.31,54.137 66.04,54.137 65.227,54.95 ; 51.206,46.755 U1.20 56.49,46.755 57.29,47.555 60.008,47.555 ; 60.008,47.555 U1.6 64.522,47.555 65.227,48.26 65.227,54.95 ; 65.227,54.95 65.227,56.947 68.047,59.766 68.047,59.944 ; 65.227,54.95 64.668,55.509 64.668,56.566 68.047,59.944
  Bottom Layer w0.4: FS1.3 11.44,61.214 14.404,61.214 FS3.3 19.078,65.888 27.139,65.888 FS5.3 ; FS2.3 11.631,58.42 16.637,58.42 FS4.3 ; TEMP.3 36.636,57.718 DST.4 ; SV3.2 53.953,63.859 58.484,63.859 58.938,63.405 SV2.2 SV1.2 65.761,62.237 v1(65.761,37.516)
DIN: U1.1 XBEE.3 | length 61
  Top Layer w0.4: XBEE.3 v1(37.499,13.225) ; U1.1 61.601,43.555 v1(63.068,42.088)
  Bottom Layer w0.4: v1(37.499,13.225) 41.732,8.992 52.064,8.992 62.424,19.351 62.424,41.443 v1(63.068,42.088)
DOUT: U1.32 XBEE.4 | length 49.2
  Top Layer w0.4: XBEE.4 33.522,15.723 34.29,15.723 36.068,17.501 v1(36.068,29.032) ; U1.32 59.696,41.427 v1(60.681,40.919)
  Bottom Layer w0.4: v1(36.068,29.032) 41.786,34.75 58.61,34.75 59.484,35.624 59.484,39.722 v1(60.681,40.919)
ECHO: DST.2 U1.14 | length 22
  Top Layer w0.4: DST.2 44.298,61.55 44.298,56.769 45.72,55.347 53.689,55.347 55.696,53.34 U1.14
FS_DATA1: FS1.2 U1.23 | length 72.2
  Top Layer w0.4: U1.23 v1(56.515,44.355)
  Bottom Layer w0.4: FS1.2 9.686,68.402 30.48,68.402 34.823,64.059 47.6,64.059 56.515,55.143 v1(56.515,44.355)
FS_DATA2: FS2.2 U1.25 | length 59.8
  Top Layer w0.4: v1(53.797,40.437) 54.096,40.736 U1.25
  Bottom Layer w0.4: FS2.2 29.651,37.236 55.889,37.236 56.436,37.782 56.436,39.421 55.42,40.437 v1(53.797,40.437)
FS_DATA3: FS3.2 U1.26 | length 62.2
  Top Layer w0.4: v1(51.254,42.291) 51.254,41.142 53.066,39.33 54.538,39.33 54.896,39.688 U1.26
  Bottom Layer w0.4: FS3.2 18.424,67.234 28.346,67.234 36.525,59.055 47.244,59.055 51.254,55.045 v1(51.254,42.291)
FS_DATA4: FS4.2 U1.27 | length 45.2
  Top Layer w0.4: v1(55.347,38.329) 55.696,38.678 U1.27
  Bottom Layer w0.4: FS4.2 37.779,39.278 54.397,39.278 v1(55.347,38.329)
FS_DATA5: FS5.2 U1.28 | length 56.6
  Top Layer w0.4: U1.28 56.496,36.62 v1(57.277,35.839)
  Bottom Layer w0.4: FS5.2 26.257,59.671 45.996,39.932 50.654,39.932 52.397,41.675 55.88,41.675 57.277,40.278 v1(57.277,35.839)
GND: B1.2 C1.2 C2.2 C3.2 C4.2 C5.1 C6.1 DST.1 PRG.6 R1.1 R2.1 R3.1 R4.1 R5.1 RG1.1 RG2.1 SV1.1 SV2.1 SV3.1 TEMP.1 U1.3 U1.5 U1.21 XBEE.1 XBEE.11 XBEE.13 XBEE.22 XBEE.35 XBEE.38 | length 336.8
  Top Layer w0.4: R1.1 3.683,50.622 5.08,49.225 8.255,49.225 9.032,50.002 ; R2.1 9.032,50.002 ; XBEE.22 9.373,34.994 ; XBEE.35 10.344,7.195 9.373,8.166 9.373,34.994 ; R4.1 13.335,49.212 13.652,49.53 R5.1 18.781,48.88 ; C3.2 20.736,46.711 18.781,48.88 ; XBEE.11 33.886,29.225 34.823,30.162 34.823,32.385 33.983,33.225 ; RG2.1 40.932,41.529 ; DST.1 38.798,58.55 TEMP.1 39.116,41.529 40.932,41.529 ; RG1.1 46.99,24.003 C2.2 48.971,19.049 49.164,19.242 C1.2 52.636,17.787 ; PRG.6 55.651,31.369 55.651,32.918 54.254,34.315 54.254,37.084 ; C5.1 57.658,8.94 57.695,8.977 C6.1 57.695,18.415 57.06,19.05 C4.2 ; U1.5 62.23,46.755 62.586,46.399 62.586,45.511 62.23,45.155 U1.3 57.95,45.155 57.15,45.955 U1.21 50.451,45.955 48.946,44.45 48.946,42.393 54.254,37.084 ; 8.748,43.982 R3.1 9.032,48.188 9.032,50.002 ; 8.748,43.982 8.748,35.619 9.373,34.994 ; 8.748,43.982 10.16,42.57 12.471,42.57 18.781,48.88 ; 9.373,34.994 9.373,35.687 11.43,37.744 30.48,37.744 32.948,35.276 XBEE.13 ; XBEE.13 33.983,33.225 ; XBEE.13 29.694,33.225 26.953,30.484 v2(26.953,13.285) v2(26.953,12.19) v2(28.048,12.19) 30.059,12.19 XBEE.1 37.13,9.225 B1.2 43.485,2.87 46.279,2.87 48.108,4.699 48.108,13.259 52.636,17.787 ; 33.983,33.225 39.346,33.225 40.361,34.239 40.361,40.957 40.932,41.529 ; 52.636,17.787 53.899,19.05 C4.2 ; 54.254,37.084 58.064,33.274 58.064,24.816 56.008,22.759 C4.2
  Bottom Layer w0.4: DST.1 49.378,65.218 49.533,65.373 SV3.1 56.667,65.373 56.699,65.405 SV2.1 SV1.1
  other v2: 25.858,11.095 26.953,11.095 28.048,11.095 25.858,12.19 25.858,13.285 28.048,13.285
MISO: PRG.4 U1.16 | length 48.3
  Top Layer w0.4: U1.16 54.096,50.622 41.91,50.622 40.081,48.793 40.081,44.45 41.58,42.951 45.491,42.951 50.676,37.767 50.676,27.286 51.673,26.289 PRG.4
MOSI: PRG.3 U1.15 | length 31
  Top Layer w0.4: v1(53.645,53.645) 54.896,52.394 U1.15 ; v1(58.395,38.049) 60.223,38.049 60.528,31.369 PRG.3
  Bottom Layer w0.4: v1(53.645,53.645) 53.823,53.467 53.823,44.856 58.395,40.284 v1(58.395,38.049)
NetB1_1: B1.1 D1.1 D2.1 | length 22
  Top Layer w0.4: D2.1 41.275,23.186 41.275,14.042 D1.1 42.672,9.423 43.18,8.915 B1.1
NetC1_1: C1.1 D1.2 RG1.3 | length 27.5
  Top Layer w0.4: RG1.3 42.672,24.765 D1.2 42.672,17.365 46.067,13.97 47.309,13.97 C1.1
NetC3_1: C3.1 D2.2 RG2.4 | length 24.9
  Top Layer w0.4: C3.1 23.206,44.069 RG2.4 33.203,36.83 35.18,34.853 D2.2
NetFS1_1: FS1.1 R1.2 | length 8.5
  Top Layer w0.4: R1.2 3.683,60.325 3.969,60.611 FS1.1
NetFS2_1: FS2.1 R2.2 | length 7.8
  Top Layer w0.4: R2.2 7.732,51.435 8.646,52.349 9.56,52.349 FS2.1
NetFS3_1: FS3.1 R3.2 | length 21.4
  Top Layer w0.4: R3.2 10.048,50.561 14.173,54.686 14.173,64.812 FS3.1
NetFS4_1: FS4.1 R4.2 | length 18.7
  Top Layer w0.4: R4.2 14.635,47.914 13.97,47.249 12.67,47.249 12.497,47.422 12.497,49.657 13.335,50.495 18.046,50.495 FS4.1
NetFS5_1: FS5.1 R5.2 | length 19
  Top Layer w0.4: R5.2 23.139,49.53 24.409,50.8 24.409,64.77 FS5.1
NetR7_1: R7.1 TEMP_LED.4 | length 21.2
  Top Layer w0.4: TEMP_LED.4 66.349,56.337 66.853,56.841 66.853,57.252 68.936,57.252 69.672,56.515 69.672,48.976 68.428,47.731 68.428,42.977 67.437,41.986 R7.1
NetR8_1: R8.1 TEMP_LED.3 | length 12.5
  Top Layer w0.4: R8.1 66.279,46.507 69.012,49.24 69.012,54.508 67.763,55.757 TEMP_LED.3
NetR9_1: R9.1 TEMP_LED.2 | length 4.2
  Top Layer w0.4: TEMP_LED.2 66.346,51.703 67.579,50.47 R9.1
RESET: PRG.2 R6.1 U1.29 | length 29.1
  Top Layer w0.4: U1.29 57.296,37.449 58.75,35.995 58.75,29.769 59.69,28.829 PRG.2 64.287,28.829 64.287,20.534 63.769,20.015 R6.1
RGB_BLUE: R9.2 U1.2 | length 8
  Top Layer w0.4: U1.2 62.804,44.355 66.279,47.83 R9.2
RGB_GRN: R7.2 U1.30 | length 11.2
  Top Layer w0.4: U1.30 58.096,40.005 58.954,39.147 63.938,39.147 65.557,40.767 R7.2
RGB_RED: R8.2 U1.31 | length 13.2
  Top Layer w0.4: U1.31 58.896,40.595 59.69,39.801 62.864,39.801 67.579,44.516 R8.2
SCK: PRG.5 U1.17 | length 40.5
  Top Layer w0.4: U1.17 42.272,49.155 40.742,47.625 40.742,45.72 41.76,44.702 45.122,44.702 53.188,36.636 53.188,29.21 PRG.5
SV_DATA1: SV1.3 U1.9 | length 13.8
  Top Layer w0.4: U1.9 59.696,54.172 SV1.3
SV_DATA2: SV2.3 U1.10 | length 11.2
  Top Layer w0.4: U1.10 58.896,60.357 SV2.3
SV_DATA3: SV3.3 U1.11 | length 15.2
  Top Layer w0.4: v1(57.76,61.373) 58.096,61.037 U1.11
  Bottom Layer w0.4: SV3.3 v1(57.76,61.373)
TRIG: DST.3 U1.13 | length 28.6
  Top Layer w0.4: DST.3 51.898,66.65 54.616,66.65 56.496,64.77 U1.13
VTEMP: TEMP.2 U1.24 | length 21
  Top Layer w0.4: v1(50.165,43.815) 50.425,43.555 U1.24
  Bottom Layer w0.4: TEMP.2 48.863,43.815 v1(50.165,43.815)
XTAL1: C5.2 CRYSTAL.1 U1.7 | length 62.2
  Top Layer w0.4: CRYSTAL.1 53.924,2.591 57.15,2.591 59.108,4.549 C5.2 ; U1.7 63.288,48.355 v1(63.622,48.69)
  Bottom Layer w0.4: CRYSTAL.1 64.592,18.491 64.592,47.72 v1(63.622,48.69)
XTAL2: C6.2 CRYSTAL.2 U1.8 | length 73.1
  Top Layer w0.4: CRYSTAL.2 50.241,9.02 50.241,3.81 52.629,1.422 58.42,1.422 60.046,3.048 60.046,9.842 59.728,10.16 C6.2 ; U1.8 61.366,49.155 v1(61.366,50.825)
  Bottom Layer w0.4: CRYSTAL.2 51.308,11.405 61.77,21.866 61.77,50.422 v1(61.366,50.825)
pads on no net: U1.12 U1.19 U1.22 XBEE.5 XBEE.6 XBEE.7 XBEE.8 XBEE.9 XBEE.10 XBEE.12 XBEE.14 XBEE.15 XBEE.16 XBEE.17 XBEE.18 XBEE.19 XBEE.20 XBEE.21 XBEE.23 XBEE.24 XBEE.25 XBEE.26 XBEE.27 XBEE.28 XBEE.29 XBEE.30 XBEE.31 XBEE.32 XBEE.33 XBEE.34 XBEE.36 XBEE.37

## Silkscreen, mask and mechanical layers (free items; w line width, h text height)
Mechanical 1:
  the board outline again, w0.3